# EAGLE board breakout (EAGLE 7.5.0)
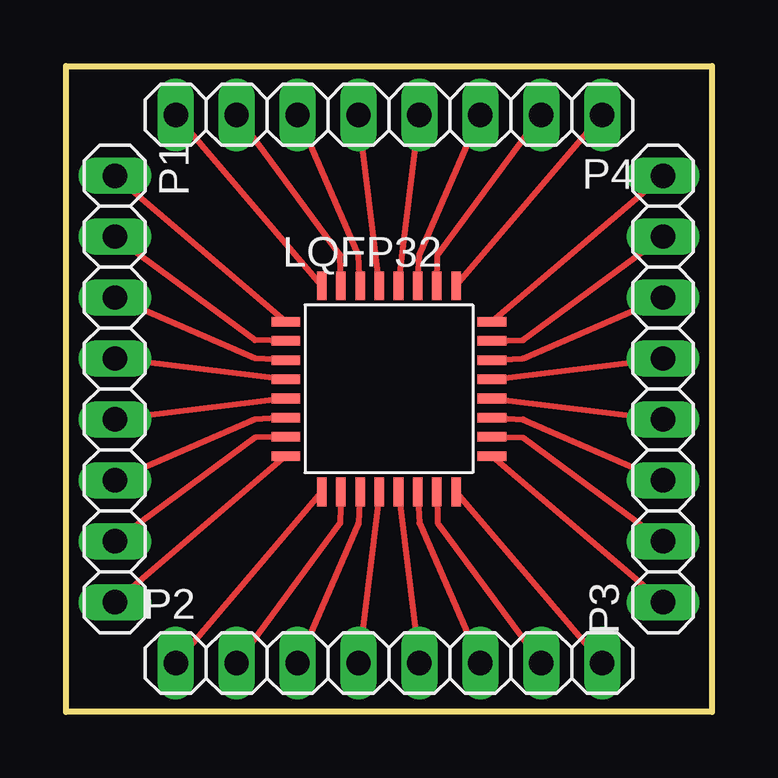
[diagram p0: board, top side]

Size 26.92 x 26.92 mm. Coordinates in mm from the lower left corner, seen from the top.
Outline: 0,26.92 26.92,26.92 26.92,0 0,0 0,26.92
Copper layers (1*16): Top 0.035mm / dielectric 1.5mm / Bottom 0.035mm
Design rules "default": minimum track width 10mil, minimum drill 24mil, track to track 8mil, track to pad 8mil, pad to pad 8mil, via to via 8mil, smd to smd 8mil, copper to edge 40mil, drill to drill 8mil, minimum pad ring 10mil, minimum via ring 8mil, stop-mask expansion 4mil, vias tented up to drill 0mil, thermal gap 10mil

## Footprints (pad centres in the part's own frame; a part is rotated, then mirrored left to right if it is on the bottom)
LQFP32-7X7 = smd 1.2 x 0.4: 1 -4.3,2.8; 2 -4.3,2; 3 -4.3,1.2; 4 -4.3,0.4; 5 -4.3,-0.4; 6 -4.3,-1.2; 7 -4.3,-2; 8 -4.3,-2.8; 17 4.3,-2.8; 18 4.3,-2; 19 4.3,-1.2; 20 4.3,-0.4; 21 4.3,0.4; 22 4.3,1.2; 23 4.3,2; 24 4.3,2.8 | smd 0.4 x 1.2: 9 -2.8,-4.3; 10 -2,-4.3; 11 -1.2,-4.3; 12 -0.4,-4.3; 13 0.4,-4.3; 14 1.2,-4.3; 15 2,-4.3; 16 2.8,-4.3; 25 2.8,4.3; 26 2,4.3; 27 1.2,4.3; 28 0.4,4.3; 29 -0.4,4.3; 30 -1.2,4.3; 31 -2,4.3; 32 -2.8,4.3
1X08 = drill 1.016 long: 1 -8.89,0; 2 -6.35,0; 3 -3.81,0; 4 -1.27,0; 5 1.27,0; 6 3.81,0; 7 6.35,0; 8 8.89,0

## Placement (x,y rotation side)
LQFP32  [LQFP32-7X7]  13.46,13.46 0 top
P1  [1X08]  2.03,13.46 270 top
P2  [1X08]  13.46,2.03 0 top
P3  [1X08]  24.89,13.46 90 top
P4  [1X08]  13.46,24.89 180 top

## Library data of the parts
LQFP32 = st-microelectronics
P1-P4 = pinhead

## Nets
S$1: LQFP32.1 P1.1
S$2: LQFP32.2 P1.2
S$3: LQFP32.3 P1.3
S$4: LQFP32.4 P1.4
S$5: LQFP32.5 P1.5
S$6: LQFP32.6 P1.6
S$7: LQFP32.7 P1.7
S$8: LQFP32.8 P1.8
S$9: LQFP32.9 P2.1
S$10: LQFP32.10 P2.2
S$11: LQFP32.11 P2.3
S$12: LQFP32.12 P2.4
S$13: LQFP32.13 P2.5
S$14: LQFP32.14 P2.6
S$15: LQFP32.15 P2.7
S$16: LQFP32.16 P2.8
S$17: LQFP32.17 P3.1
S$18: LQFP32.18 P3.2
S$19: LQFP32.19 P3.3
S$20: LQFP32.20 P3.4
S$21: LQFP32.21 P3.5
S$22: LQFP32.22 P3.6
S$23: LQFP32.23 P3.7
S$24: LQFP32.24 P3.8
S$25: LQFP32.25 P4.1
S$26: LQFP32.26 P4.2
S$27: LQFP32.27 P4.3
S$28: LQFP32.28 P4.4
S$29: LQFP32.29 P4.5
S$30: LQFP32.30 P4.6
S$31: LQFP32.31 P4.7
S$32: LQFP32.32 P4.8

## Tracks (layer width: path | path; a pad name or v marks a point on that pad's centre or on a via)
S$1
  Top 0.254: LQFP32.1 P1.1
S$2
  Top 0.254: LQFP32.2 7.87,15.49 P1.2
S$3
  Top 0.254: LQFP32.3 7.87,14.73 P1.3
S$4
  Top 0.254: LQFP32.4 P1.4
S$5
  Top 0.254: LQFP32.5 P1.5
S$6
  Top 0.254: LQFP32.6 7.87,12.19 P1.6
S$7
  Top 0.254: LQFP32.7 7.87,11.43 P1.7
S$8
  Top 0.254: LQFP32.8 P1.8
S$9
  Top 0.254: LQFP32.9 P2.1
S$10
  Top 0.254: LQFP32.10 11.43,7.87 P2.2
S$11
  Top 0.254: LQFP32.11 12.19,7.87 P2.3
S$12
  Top 0.254: LQFP32.12 P2.4
S$13
  Top 0.254: LQFP32.13 P2.5
S$14
  Top 0.254: LQFP32.14 14.73,7.87 P2.6
S$15
  Top 0.254: LQFP32.15 15.49,7.87 P2.7
S$16
  Top 0.254: LQFP32.16 P2.8
S$17
  Top 0.254: LQFP32.17 P3.1
S$18
  Top 0.254: LQFP32.18 19.05,11.43 P3.2
S$19
  Top 0.254: LQFP32.19 19.05,12.19 P3.3
S$20
  Top 0.254: LQFP32.20 P3.4
S$21
  Top 0.254: LQFP32.21 P3.5
S$22
  Top 0.254: LQFP32.22 19.05,14.73 P3.6
S$23
  Top 0.254: LQFP32.23 19.05,15.49 P3.7
S$24
  Top 0.254: LQFP32.24 P3.8
S$25
  Top 0.254: LQFP32.25 P4.1
S$26
  Top 0.254: LQFP32.26 15.49,19.05 P4.2
S$27
  Top 0.254: LQFP32.27 14.73,19.05 P4.3
S$28
  Top 0.254: LQFP32.28 P4.4
S$29
  Top 0.254: LQFP32.29 P4.5
S$30
  Top 0.254: LQFP32.30 12.19,19.05 P4.6
S$31
  Top 0.254: LQFP32.31 11.43,19.05 P4.7
S$32
  Top 0.254: LQFP32.32 P4.8